# EAGLE board SOT-23-5 (EAGLE 6.4)
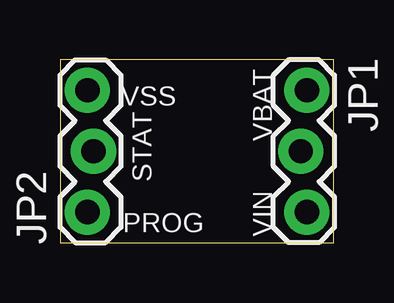
[diagram p0: board, top side]
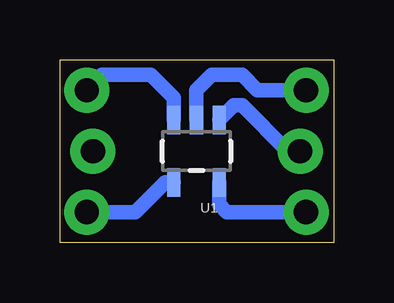
[diagram p1: board, bottom side, seen from below]

Size 11.4 x 7.61 mm. Coordinates in mm from the lower left corner, seen from the top.
Outline: 0,0 11.4,0 11.4,7.61 0,7.61 0,0
Copper layers (1*16): Top 0.035mm / dielectric 1.5mm / Bottom 0.035mm
Design rules "default": minimum track width 10mil, minimum drill 24mil, track to track 8mil, track to pad 8mil, pad to pad 8mil, via to via 8mil, smd to smd 8mil, copper to edge 40mil, drill to drill 8mil, minimum pad ring 10mil, minimum via ring 8mil, stop-mask expansion 4mil, vias tented up to drill 0mil, thermal gap 10mil

## Footprints (pad centres in the part's own frame; a part is rotated, then mirrored left to right if it is on the bottom)
1X03_LOCK = drill 1.016 pad 1.88: 1 0,0.127; 2 2.54,-0.127; 3 5.08,0.127
SOT23-5 = smd 0.55 x 1.2: 1 -0.95,-1.3; 2 0,-1.3; 3 0.95,-1.3; 4 0.95,1.3; 5 -0.95,1.3

## Placement (x,y rotation side)
JP1  [1X03_LOCK]  10.16,6.35 270 top
JP2  [1X03_LOCK]  1.27,1.27 90 top
U1  MCP73831  [SOT23-5]  5.71,3.81 180 bottom

## Library data of the parts
JP1 JP2 U1 = SparkFun

## Nets
PROG: JP2.1 U1.5
STAT: JP2.2 U1.1
VBAT: JP1.1 U1.3
VIN: JP1.3 U1.4
VSS: JP2.3 U1.2

## Tracks (layer width: path | path; a pad name or v marks a point on that pad's centre or on a via)
PROG
  Bottom 0.61: U1.5 4.76,1.59 4.45,1.27 JP2.1
STAT
  Bottom 0.61: JP2.2 1.91,3.81 3.81,5.71 4.16,5.71 U1.1
VBAT
  Bottom 0.61: U1.3 6.67,6.03 7.62,6.99 9.65,6.99 JP1.1
VIN
  Bottom 0.61: U1.4 7.01,2.51 8.26,1.27 JP1.3
VSS
  Bottom 0.61: JP2.3 3.17,6.35 3.81,6.99 5.08,6.99 5.71,6.35 U1.2

## Text on the board
_tsilk: VBAT | VSS | STAT | VIN | PROG